# Altium PCB PCB_CONTROL.PcbDoc (part 15 of 15)
Units mil, origin at the board's own origin, x right, y up, seen from the top; angles counter-clockwise.
Board outline 7360.03 x 4773.15 mil, 2 copper layers (Top Layer, Bottom Layer); 73 components, 135 nets, 396 pads, 106 vias.
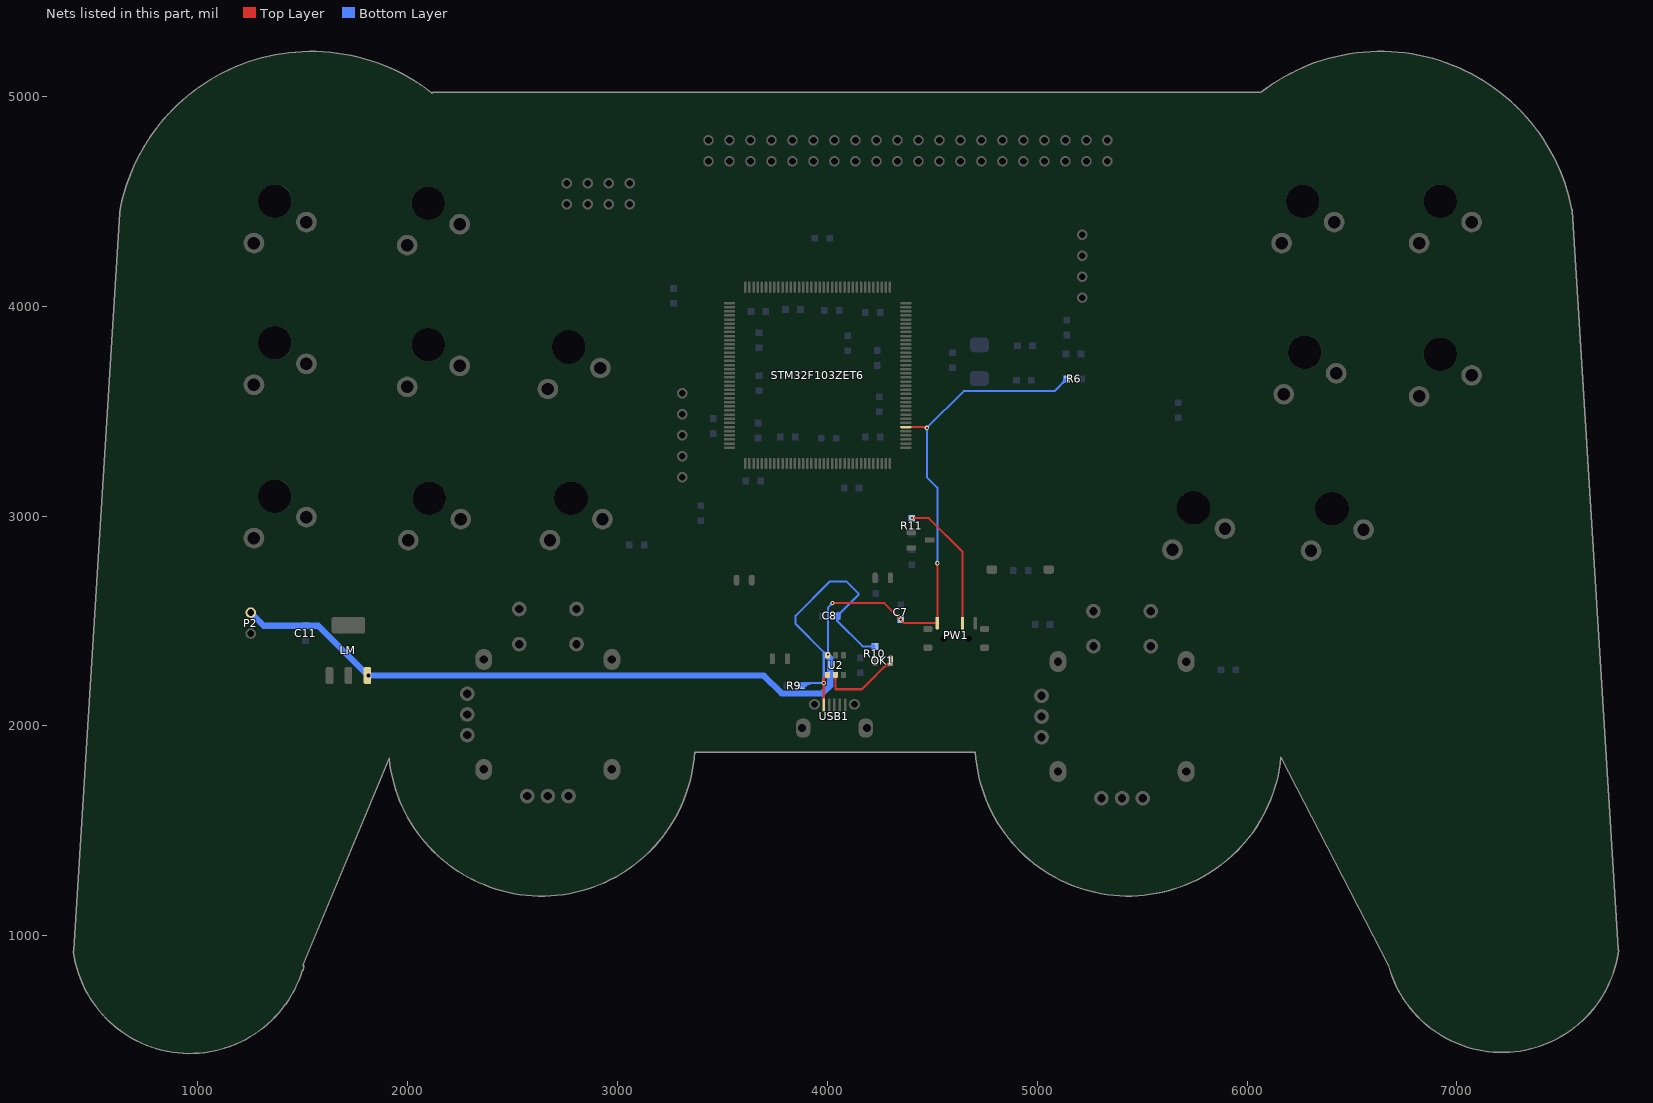
[diagram p15: the nets of this part, all layers, seen from the top]

## Via types
v1: diameter 20, hole 10, Top Layer to Bottom Layer, 104 vias
v2: diameter 30, hole 20, Top Layer to Bottom Layer, 2 vias

## Nets (pads, with @x,y where several pads share a name; then routed paths per layer and width w, separated by ;. In a path a pad name is that pad's centre, name@x,y a point inside that pad or via, vN(x,y) a via of type N, cw(c..) or ccw(c..) an arc to the next point about the centre after c; other vN are vias at no path point) (continued)
STDBY: OK1.2 U2.5 | length 1759.7
  Top Layer w10: U2.5@4040,2243 4040,2175 4166,2175 OK1.2@4301,2310 ; U2.5@4035.05,2235.05 cw(c4023.1,2223.1) 4040,2223.1 ; U2.5@4035.05,2235.05 cw(c4023.1,2223.1) 4040,2223.1 ; U2.5@4035.05,2235.05 cw(c4023.1,2223.1) 4040,2223.1 ; U2.5@4035.05,2235.05 cw(c4023.1,2223.1) 4040,2223.1 ; U2.5@4035.05,2235.05 cw(c4023.1,2223.1) 4040,2223.1 ; U2.5@4035.05,2235.05 cw(c4023.1,2223.1) 4040,2223.1 ; U2.5@4035.05,2235.05 cw(c4023.1,2223.1) 4040,2223.1 ; U2.5@4035.05,2235.05 cw(c4023.1,2223.1) 4040,2223.1 ; U2.5@4035.05,2235.05 cw(c4023.1,2223.1) 4040,2223.1 ; U2.5@4035.05,2235.05 cw(c4023.1,2223.1) 4040,2223.1 ; U2.5@4036.06,2234.22 cw(c4031.7,2227.83) 4039.42,2227.47 ; U2.5@4036.06,2234.22 cw(c4031.7,2227.83) 4039.42,2227.47 ; U2.5@4036.06,2234.22 cw(c4031.7,2227.83) 4039.42,2227.47 ; U2.5@4036.06,2234.22 cw(c4031.7,2227.83) 4039.42,2227.47 ; U2.5@4036.06,2234.22 cw(c4031.7,2227.83) 4039.42,2227.47 ; U2.5@4036.06,2234.22 cw(c4031.7,2227.83) 4039.42,2227.47 ; U2.5@4036.06,2234.22 cw(c4031.7,2227.83) 4039.42,2227.47 ; U2.5@4036.06,2234.22 cw(c4031.7,2227.83) 4039.42,2227.47 ; U2.5@4036.06,2234.22 cw(c4031.7,2227.83) 4039.42,2227.47 ; U2.5@4036.06,2234.22 cw(c4031.7,2227.83) 4039.42,2227.47 ; U2.5@4036.06,2234.22 cw(c4031.7,2227.83) 4039.42,2227.47 ; U2.5@4036.06,2234.22 cw(c4031.7,2227.83) 4039.42,2227.47 ; U2.5@4036.06,2234.22 cw(c4031.7,2227.83) 4039.42,2227.47 ; U2.5@4036.06,2234.22 cw(c4031.7,2227.83) 4039.42,2227.47 ; U2.5@4036.06,2234.22 cw(c4031.7,2227.83) 4039.42,2227.47 ; U2.5@4036.06,2234.22 cw(c4031.7,2227.83) 4039.42,2227.47 ; U2.5@4036.6,2233.88 cw(c4032.85,2227.12) 4040.58,2227.47 ; U2.5@4036.6,2233.88 cw(c4032.85,2227.12) 4040.58,2227.47 ; U2.5@4036.6,2233.88 cw(c4032.85,2227.12) 4040.58,2227.47 ; U2.5@4036.6,2233.88 cw(c4032.85,2227.12) 4040.58,2227.47 ; U2.5@4036.6,2233.88 cw(c4032.85,2227.12) 4040.58,2227.47 ; U2.5@4036.6,2233.88 cw(c4032.85,2227.12) 4040.58,2227.47 ; U2.5@4036.6,2233.88 cw(c4032.85,2227.12) 4040.58,2227.47 ; U2.5@4036.6,2233.88 cw(c4032.85,2227.12) 4040.58,2227.47 ; U2.5@4036.6,2233.88 cw(c4032.85,2227.12) 4040.58,2227.47 ; U2.5@4036.6,2233.88 cw(c4032.85,2227.12) 4040.58,2227.47 ; U2.5@4036.6,2233.88 cw(c4032.85,2227.12) 4040.58,2227.47 ; U2.5@4036.6,2233.88 cw(c4032.85,2227.12) 4040.58,2227.47 ; U2.5@4036.6,2233.88 cw(c4032.85,2227.12) 4040.58,2227.47 ; U2.5@4036.6,2233.88 cw(c4032.85,2227.12) 4040.58,2227.47 ; U2.5@4036.6,2233.88 cw(c4032.85,2227.12) 4040.58,2227.47 ; U2.5@4036.6,2233.88 cw(c4032.85,2227.12) 4040.58,2227.47 ; 4039.42,2227.47 cw(c4047.15,2227.12) U2.5@4043.4,2233.88 ; 4039.42,2227.47 cw(c4047.15,2227.12) U2.5@4043.4,2233.88 ; 4039.42,2227.47 cw(c4047.15,2227.12) U2.5@4043.4,2233.88 ; 4039.42,2227.47 cw(c4047.15,2227.12) U2.5@4043.4,2233.88 ; 4039.42,2227.47 cw(c4047.15,2227.12) U2.5@4043.4,2233.88 ; 4039.42,2227.47 cw(c4047.15,2227.12) U2.5@4043.4,2233.88 ; 4039.42,2227.47 cw(c4047.15,2227.12) U2.5@4043.4,2233.88 ; 4039.42,2227.47 cw(c4047.15,2227.12) U2.5@4043.4,2233.88 ; 4039.42,2227.47 cw(c4047.15,2227.12) U2.5@4043.4,2233.88 ; 4039.42,2227.47 cw(c4047.15,2227.12) U2.5@4043.4,2233.88 ; 4039.42,2227.47 cw(c4047.15,2227.12) U2.5@4043.4,2233.88 ; 4039.42,2227.47 cw(c4047.15,2227.12) U2.5@4043.4,2233.88 ; 4039.42,2227.47 cw(c4047.15,2227.12) U2.5@4043.4,2233.88 ; 4039.42,2227.47 cw(c4047.15,2227.12) U2.5@4043.4,2233.88 ; 4039.42,2227.47 cw(c4047.15,2227.12) U2.5@4043.4,2233.88 ; 4039.42,2227.47 cw(c4047.15,2227.12) U2.5@4043.4,2233.88 ; 4039.42,2227.47 4046.62,2237.74 4039.42,2227.47 ; 4039.42,2227.47 4033.2,2238.36 4039.42,2227.47 ; 4039.42,2227.47 U2.5@4040,2240 ; 4039.42,2227.47 U2.5@4040,2240 ; 4040,2223.1 cw(c4056.9,2223.1) U2.5@4044.95,2235.05 ; 4040,2223.1 cw(c4056.9,2223.1) U2.5@4044.95,2235.05 ; 4040,2223.1 cw(c4056.9,2223.1) U2.5@4044.95,2235.05 ; 4040,2223.1 cw(c4056.9,2223.1) U2.5@4044.95,2235.05 ; 4040,2223.1 cw(c4056.9,2223.1) U2.5@4044.95,2235.05 ; 4040,2223.1 cw(c4056.9,2223.1) U2.5@4044.95,2235.05 ; 4040,2223.1 cw(c4056.9,2223.1) U2.5@4044.95,2235.05 ; 4040,2223.1 cw(c4056.9,2223.1) U2.5@4044.95,2235.05 ; 4040,2223.1 cw(c4056.9,2223.1) U2.5@4044.95,2235.05 ; 4040,2223.1 cw(c4056.9,2223.1) U2.5@4044.95,2235.05 ; U2.5@4040,2240 4040.58,2227.47 ; U2.5@4040,2240 4040.58,2227.47 ; 4040.58,2227.47 cw(c4048.3,2227.83) U2.5@4043.94,2234.22 ; 4040.58,2227.47 cw(c4048.3,2227.83) U2.5@4043.94,2234.22 ; 4040.58,2227.47 cw(c4048.3,2227.83) U2.5@4043.94,2234.22 ; 4040.58,2227.47 cw(c4048.3,2227.83) U2.5@4043.94,2234.22 ; 4040.58,2227.47 cw(c4048.3,2227.83) U2.5@4043.94,2234.22 ; 4040.58,2227.47 cw(c4048.3,2227.83) U2.5@4043.94,2234.22 ; 4040.58,2227.47 cw(c4048.3,2227.83) U2.5@4043.94,2234.22 ; 4040.58,2227.47 cw(c4048.3,2227.83) U2.5@4043.94,2234.22 ; 4040.58,2227.47 cw(c4048.3,2227.83) U2.5@4043.94,2234.22 ; 4040.58,2227.47 cw(c4048.3,2227.83) U2.5@4043.94,2234.22 ; 4040.58,2227.47 cw(c4048.3,2227.83) U2.5@4043.94,2234.22 ; 4040.58,2227.47 cw(c4048.3,2227.83) U2.5@4043.94,2234.22 ; 4040.58,2227.47 cw(c4048.3,2227.83) U2.5@4043.94,2234.22 ; 4040.58,2227.47 cw(c4048.3,2227.83) U2.5@4043.94,2234.22 ; 4040.58,2227.47 cw(c4048.3,2227.83) U2.5@4043.94,2234.22 ; 4040.58,2227.47 cw(c4048.3,2227.83) U2.5@4043.94,2234.22 ; 4040.58,2227.47 4046.8,2238.36 4040.58,2227.47 ; 4040.58,2227.47 4033.38,2237.74 4040.58,2227.47 ; 4266.86,2275.86 cw(c4301,2241.72) OK1.2@4301,2290 ; 4266.86,2275.86 cw(c4301,2241.72) OK1.2@4301,2290 ; 4266.86,2275.86 cw(c4301,2241.72) OK1.2@4301,2290 ; 4266.86,2275.86 cw(c4301,2241.72) OK1.2@4301,2290 ; 4266.86,2275.86 cw(c4301,2241.72) OK1.2@4301,2290 ; 4266.86,2275.86 cw(c4301,2241.72) OK1.2@4301,2290 ; 4266.86,2275.86 cw(c4301,2241.72) OK1.2@4301,2290 ; 4266.86,2275.86 cw(c4301,2241.72) OK1.2@4301,2290 ; 4283.93,2292.93 cw(c4301,2275.86) OK1.2@4301,2300 ; 4283.93,2292.93 cw(c4301,2275.86) OK1.2@4301,2300 ; 4283.93,2292.93 cw(c4301,2275.86) OK1.2@4301,2300 ; 4283.93,2292.93 cw(c4301,2275.86) OK1.2@4301,2300 ; 4283.93,2292.93 cw(c4301,2275.86) OK1.2@4301,2300 ; 4283.93,2292.93 cw(c4301,2275.86) OK1.2@4301,2300 ; 4283.93,2292.93 cw(c4301,2275.86) OK1.2@4301,2300 ; 4283.93,2292.93 cw(c4301,2275.86) OK1.2@4301,2300
VBAT: C7.1 C11.2 LM.3 P2.2 PW1.3 R6.2 STM32F103ZET6.6 U2.3 | length 8905.9
  Top Layer w10: v1(4025,2585) 4273,2585 v1(4351,2507) ; 4319.79,2538.21 v1(4351,2507) ; STM32F103ZET6.6@4375,3423.94 4471.06,3423.94 v1(4475,3420) ; STM32F103ZET6.6@4396,3423.94 4432,3423.94 ; 4487,2490 PW1.3@4525,2490 ; PW1.3@4525,2512 4525,2550 ; 4525,2735 v1(4525,2775) PW1.3@4525,2490 ; v1@4028.54,2581.46 cw(c4037.07,2572.93) 4037.07,2585 ; v1@4028.54,2581.46 cw(c4037.07,2572.93) 4037.07,2585 ; v1@4028.54,2581.46 cw(c4037.07,2572.93) 4037.07,2585 ; v1@4028.54,2581.46 cw(c4037.07,2572.93) 4037.07,2585 ; v1@4028.54,2581.46 cw(c4037.07,2572.93) 4037.07,2585 ; v1@4028.54,2581.46 cw(c4037.07,2572.93) 4037.07,2585 ; v1@4028.54,2581.46 cw(c4037.07,2572.93) 4037.07,2585 ; v1@4028.54,2581.46 cw(c4037.07,2572.93) 4037.07,2585 ; v1@4028.54,2581.46 cw(c4037.07,2572.93) 4037.07,2585 ; v1@4028.54,2588.54 ccw(c4037.07,2597.07) 4037.07,2585 ; v1@4028.54,2588.54 ccw(c4037.07,2597.07) 4037.07,2585 ; v1@4028.54,2588.54 ccw(c4037.07,2597.07) 4037.07,2585 ; v1@4028.54,2588.54 ccw(c4037.07,2597.07) 4037.07,2585 ; v1@4028.54,2588.54 ccw(c4037.07,2597.07) 4037.07,2585 ; v1@4028.54,2588.54 ccw(c4037.07,2597.07) 4037.07,2585 ; v1@4028.54,2588.54 ccw(c4037.07,2597.07) 4037.07,2585 ; v1@4028.54,2588.54 ccw(c4037.07,2597.07) 4037.07,2585 ; v1@4028.54,2588.54 ccw(c4037.07,2597.07) 4037.07,2585 ; 4342.46,2515.54 cw(c4333.93,2507) v1@4346,2507 ; 4342.46,2515.54 ccw(c4351,2524.07) v1@4351,2512 ; 4342.46,2515.54 cw(c4333.93,2507) v1@4346,2507 ; 4342.46,2515.54 ccw(c4351,2524.07) v1@4351,2512 ; 4342.46,2515.54 ccw(c4351,2524.07) v1@4351,2512 ; 4342.46,2515.54 cw(c4333.93,2507) v1@4346,2507 ; 4342.46,2515.54 ccw(c4351,2524.07) v1@4351,2512 ; 4342.46,2515.54 cw(c4333.93,2507) v1@4346,2507 ; 4342.46,2515.54 ccw(c4351,2524.07) v1@4351,2512 ; 4342.46,2515.54 cw(c4333.93,2507) v1@4346,2507 ; 4342.46,2515.54 ccw(c4351,2524.07) v1@4351,2512 ; 4342.46,2515.54 cw(c4333.93,2507) v1@4346,2507 ; 4342.46,2515.54 ccw(c4351,2524.07) v1@4351,2512 ; 4342.46,2515.54 cw(c4333.93,2507) v1@4346,2507 ; 4342.46,2515.54 ccw(c4351,2524.07) v1@4351,2512 ; 4342.46,2515.54 cw(c4333.93,2507) v1@4346,2507 ; 4342.46,2515.54 ccw(c4351,2524.07) v1@4351,2512 ; 4342.46,2515.54 cw(c4333.93,2507) v1@4346,2507 ; 4342.46,2515.54 ccw(c4351,2524.07) v1@4351,2512 ; 4342.46,2515.54 cw(c4333.93,2507) v1@4346,2507 ; 4342.46,2515.54 ccw(c4351,2524.07) v1@4351,2512 ; 4342.46,2515.54 cw(c4333.93,2507) v1@4346,2507 ; 4342.46,2515.54 ccw(c4351,2524.07) v1@4351,2512 ; 4342.46,2515.54 cw(c4333.93,2507) v1@4346,2507 ; 4342.46,2515.54 ccw(c4351,2524.07) v1@4351,2512 ; 4342.46,2515.54 cw(c4333.93,2507) v1@4346,2507 ; 4342.46,2515.54 ccw(c4351,2524.07) v1@4351,2512 ; 4342.46,2515.54 cw(c4333.93,2507) v1@4346,2507 ; 4342.46,2515.54 ccw(c4351,2524.07) v1@4351,2512 ; 4342.46,2515.54 cw(c4333.93,2507) v1@4346,2507 ; 4342.46,2515.54 ccw(c4351,2524.07) v1@4351,2512 ; 4342.46,2515.54 cw(c4333.93,2507) v1@4346,2507 ; 4342.46,2515.54 ccw(c4351,2524.07) v1@4351,2512 ; 4342.46,2515.54 cw(c4333.93,2507) v1@4346,2507 ; v1@4351,2502 cw(c4351,2489.93) 4359.54,2498.46 ; v1@4351,2502 cw(c4351,2489.93) 4359.54,2498.46 ; v1@4351,2502 cw(c4351,2489.93) 4359.54,2498.46 ; v1@4351,2502 cw(c4351,2489.93) 4359.54,2498.46 ; v1@4351,2502 cw(c4351,2489.93) 4359.54,2498.46 ; v1@4351,2502 cw(c4351,2489.93) 4359.54,2498.46 ; v1@4351,2502 cw(c4351,2489.93) 4359.54,2498.46 ; v1@4351,2502 cw(c4351,2489.93) 4359.54,2498.46 ; v1@4351,2502 cw(c4351,2489.93) 4359.54,2498.46 ; v1(4351,2507) 4368,2490 PW1.3@4525,2490 ; v1@4356,2507 ccw(c4368.07,2507) 4359.54,2498.46 ; v1@4356,2507 ccw(c4368.07,2507) 4359.54,2498.46 ; v1@4356,2507 ccw(c4368.07,2507) 4359.54,2498.46 ; v1@4356,2507 ccw(c4368.07,2507) 4359.54,2498.46 ; v1@4356,2507 ccw(c4368.07,2507) 4359.54,2498.46 ; v1@4356,2507 ccw(c4368.07,2507) 4359.54,2498.46 ; v1@4356,2507 ccw(c4368.07,2507) 4359.54,2498.46 ; v1@4356,2507 ccw(c4368.07,2507) 4359.54,2498.46 ; v1@4356,2507 ccw(c4368.07,2507) 4359.54,2498.46 ; 4453.42,3423.94 cw(c4453.42,3398.42) v1@4471.46,3416.46 ; 4453.42,3423.94 cw(c4453.42,3398.42) v1@4471.46,3416.46 ; 4453.42,3423.94 cw(c4453.42,3398.42) v1@4471.46,3416.46 ; 4453.42,3423.94 cw(c4453.42,3398.42) v1@4471.46,3416.46 ; 4453.42,3423.94 cw(c4453.42,3398.42) v1@4471.46,3416.46 ; 4453.42,3423.94 cw(c4453.42,3398.42) v1@4471.46,3416.46 ; 4453.42,3423.94 cw(c4453.42,3398.42) v1@4471.46,3416.46 ; 4453.42,3423.94 cw(c4453.42,3398.42) v1@4471.46,3416.46 ; 4462.44,3421.67 ccw(c4465.89,3427.64) v1@4471.17,3423.21 ; 4462.44,3421.67 ccw(c4465.89,3427.64) v1@4471.17,3423.21 ; 4462.44,3421.67 ccw(c4465.89,3427.64) v1@4471.17,3423.21 ; 4462.44,3421.67 ccw(c4465.89,3427.64) v1@4471.17,3423.21 ; 4462.44,3421.67 ccw(c4465.89,3427.64) v1@4471.17,3423.21 ; 4462.44,3421.67 ccw(c4465.89,3427.64) v1@4471.17,3423.21 ; 4462.44,3421.67 ccw(c4465.89,3427.64) v1@4471.17,3423.21 ; 4462.44,3421.67 ccw(c4465.89,3427.64) v1@4471.17,3423.21 ; 4462.44,3421.67 ccw(c4465.89,3427.64) v1@4471.17,3423.21 ; 4462.44,3421.67 ccw(c4465.89,3427.64) v1@4471.17,3423.21 ; 4462.44,3421.67 ccw(c4465.89,3427.64) v1@4471.17,3423.21 ; 4462.44,3421.67 ccw(c4465.89,3427.64) v1@4471.17,3423.21 ; 4462.44,3421.67 ccw(c4465.89,3427.64) v1@4471.17,3423.21 ; 4462.44,3421.67 ccw(c4465.89,3427.64) v1@4471.17,3423.21 ; 4462.44,3421.67 ccw(c4465.89,3427.64) v1@4471.17,3423.21 ; 4462.44,3421.67 ccw(c4465.89,3427.64) v1@4471.17,3423.21 ; 4462.44,3421.67 ccw(c4465.89,3427.64) v1@4471.17,3423.21 ; 4462.44,3421.67 ccw(c4465.89,3427.64) v1@4471.17,3423.21 ; 4462.44,3421.67 ccw(c4465.89,3427.64) v1@4471.17,3423.21 ; 4462.44,3421.67 ccw(c4465.89,3427.64) v1@4471.17,3423.21 ; 4462.44,3421.67 ccw(c4465.89,3427.64) v1@4471.17,3423.21 ; 4462.44,3421.67 ccw(c4465.89,3427.64) v1@4471.17,3423.21 ; 4462.44,3421.67 ccw(c4465.89,3427.64) v1@4471.17,3423.21 ; 4462.44,3421.67 ccw(c4465.89,3427.64) v1@4471.17,3423.21 ; 4462.44,3421.67 ccw(c4465.89,3427.64) v1@4471.17,3423.21 ; 4462.44,3421.67 ccw(c4465.89,3427.64) v1@4471.17,3423.21 ; 4462.44,3421.67 ccw(c4465.89,3427.64) v1@4471.17,3423.21 ; 4462.44,3421.67 ccw(c4465.89,3427.64) v1@4471.17,3423.21 ; v1@4521.46,2771.46 cw(c4512.93,2762.93) 4525,2762.93 ; v1@4521.46,2771.46 cw(c4512.93,2762.93) 4525,2762.93 ; v1@4521.46,2771.46 cw(c4512.93,2762.93) 4525,2762.93 ; v1@4521.46,2771.46 cw(c4512.93,2762.93) 4525,2762.93 ; v1@4521.46,2771.46 cw(c4512.93,2762.93) 4525,2762.93 ; v1@4521.46,2771.46 cw(c4512.93,2762.93) 4525,2762.93 ; v1@4521.46,2771.46 cw(c4512.93,2762.93) 4525,2762.93 ; v1@4521.46,2771.46 cw(c4512.93,2762.93) 4525,2762.93 ; v1@4521.46,2771.46 cw(c4512.93,2762.93) 4525,2762.93 ; v1@4521.46,2771.46 cw(c4512.93,2762.93) 4525,2762.93 ; v1@4521.46,2771.46 cw(c4512.93,2762.93) 4525,2762.93 ; v1@4521.46,2771.46 cw(c4512.93,2762.93) 4525,2762.93 ; v1@4521.46,2771.46 cw(c4512.93,2762.93) 4525,2762.93 ; v1@4521.46,2771.46 cw(c4512.93,2762.93) 4525,2762.93 ; v1@4521.46,2771.46 cw(c4512.93,2762.93) 4525,2762.93 ; v1@4521.46,2771.46 cw(c4512.93,2762.93) 4525,2762.93 ; v1@4521.46,2771.46 cw(c4512.93,2762.93) 4525,2762.93 ; 4525,2762.93 cw(c4537.07,2762.93) v1@4528.54,2771.46 ; 4525,2762.93 cw(c4537.07,2762.93) v1@4528.54,2771.46 ; 4525,2762.93 cw(c4537.07,2762.93) v1@4528.54,2771.46 ; 4525,2762.93 cw(c4537.07,2762.93) v1@4528.54,2771.46 ; 4525,2762.93 cw(c4537.07,2762.93) v1@4528.54,2771.46 ; 4525,2762.93 cw(c4537.07,2762.93) v1@4528.54,2771.46 ; 4525,2762.93 cw(c4537.07,2762.93) v1@4528.54,2771.46 ; 4525,2762.93 cw(c4537.07,2762.93) v1@4528.54,2771.46 ; 4525,2762.93 cw(c4537.07,2762.93) v1@4528.54,2771.46 ; 4525,2762.93 cw(c4537.07,2762.93) v1@4528.54,2771.46 ; 4525,2762.93 cw(c4537.07,2762.93) v1@4528.54,2771.46 ; 4525,2762.93 cw(c4537.07,2762.93) v1@4528.54,2771.46 ; 4525,2762.93 cw(c4537.07,2762.93) v1@4528.54,2771.46 ; 4525,2762.93 cw(c4537.07,2762.93) v1@4528.54,2771.46 ; 4525,2762.93 cw(c4537.07,2762.93) v1@4528.54,2771.46 ; 4525,2762.93 cw(c4537.07,2762.93) v1@4528.54,2771.46 ; 4525,2762.93 cw(c4537.07,2762.93) v1@4528.54,2771.46
  Bottom Layer w10: v1@4001.45,2336.48 cw(c3992.87,2327.98) 4004.95,2327.93 cw(c4017.02,2327.87) v1@4008.52,2336.45 ; v1(4005,2340) 4005,2565 ; 4475,3380 v1(4475,3420) ; v1(4525,2775) 4525,3135 4475,3185 v1(4475,3420) ; R6.2@5141,3653 5083,3595 4650,3595 v1(4475,3420) ; v1@4001.46,2343.54 ccw(c3992.93,2352.07) 4005,2352.07 ; v1@4001.46,2343.54 ccw(c3992.93,2352.07) 4005,2352.07 ; v1@4001.46,2343.54 ccw(c3992.93,2352.07) 4005,2352.07 ; v1@4001.46,2343.54 ccw(c3992.93,2352.07) 4005,2352.07 ; v1@4001.46,2343.54 ccw(c3992.93,2352.07) 4005,2352.07 ; v1@4001.46,2343.54 ccw(c3992.93,2352.07) 4005,2352.07 ; v1@4001.46,2343.54 ccw(c3992.93,2352.07) 4005,2352.07 ; v1@4001.46,2343.54 ccw(c3992.93,2352.07) 4005,2352.07 ; v1@4001.46,2343.54 ccw(c3992.93,2352.07) 4005,2352.07 ; 4005,2352.07 ccw(c4017.07,2352.07) v1@4008.54,2343.54 ; 4005,2352.07 ccw(c4017.07,2352.07) v1@4008.54,2343.54 ; 4005,2352.07 ccw(c4017.07,2352.07) v1@4008.54,2343.54 ; 4005,2352.07 ccw(c4017.07,2352.07) v1@4008.54,2343.54 ; 4005,2352.07 ccw(c4017.07,2352.07) v1@4008.54,2343.54 ; 4005,2352.07 ccw(c4017.07,2352.07) v1@4008.54,2343.54 ; 4005,2352.07 ccw(c4017.07,2352.07) v1@4008.54,2343.54 ; 4005,2352.07 ccw(c4017.07,2352.07) v1@4008.54,2343.54 ; 4005,2352.07 ccw(c4017.07,2352.07) v1@4008.54,2343.54 ; 4005,2565 v1(4025,2585) 4005,2565 ; 4016.46,2576.46 cw(c4025,2567.93) v1@4025,2580 ; 4016.46,2576.46 ccw(c4007.93,2585) v1@4020,2585 ; 4016.46,2576.46 cw(c4025,2567.93) v1@4025,2580 ; 4016.46,2576.46 ccw(c4007.93,2585) v1@4020,2585 ; 4016.46,2576.46 ccw(c4007.93,2585) v1@4020,2585 ; 4016.46,2576.46 cw(c4025,2567.93) v1@4025,2580 ; 4016.46,2576.46 ccw(c4007.93,2585) v1@4020,2585 ; 4016.46,2576.46 cw(c4025,2567.93) v1@4025,2580 ; 4016.46,2576.46 ccw(c4007.93,2585) v1@4020,2585 ; 4016.46,2576.46 cw(c4025,2567.93) v1@4025,2580 ; 4016.46,2576.46 ccw(c4007.93,2585) v1@4020,2585 ; 4016.46,2576.46 cw(c4025,2567.93) v1@4025,2580 ; 4016.46,2576.46 ccw(c4007.93,2585) v1@4020,2585 ; 4016.46,2576.46 cw(c4025,2567.93) v1@4025,2580 ; 4016.46,2576.46 ccw(c4007.93,2585) v1@4020,2585 ; 4016.46,2576.46 cw(c4025,2567.93) v1@4025,2580 ; 4016.46,2576.46 ccw(c4007.93,2585) v1@4020,2585 ; 4016.46,2576.46 cw(c4025,2567.93) v1@4025,2580 ; 4016.46,2576.46 ccw(c4007.93,2585) v1@4020,2585 ; 4016.46,2576.46 cw(c4025,2567.93) v1@4025,2580 ; 4016.46,2576.46 ccw(c4007.93,2585) v1@4020,2585 ; 4016.46,2576.46 cw(c4025,2567.93) v1@4025,2580 ; 4016.46,2576.46 ccw(c4007.93,2585) v1@4020,2585 ; 4016.46,2576.46 cw(c4025,2567.93) v1@4025,2580 ; 4016.46,2576.46 ccw(c4007.93,2585) v1@4020,2585 ; 4016.46,2576.46 cw(c4025,2567.93) v1@4025,2580 ; 4016.46,2576.46 ccw(c4007.93,2585) v1@4020,2585 ; 4016.46,2576.46 cw(c4025,2567.93) v1@4025,2580 ; 4016.46,2576.46 ccw(c4007.93,2585) v1@4020,2585 ; 4016.46,2576.46 cw(c4025,2567.93) v1@4025,2580 ; 4016.46,2576.46 ccw(c4007.93,2585) v1@4020,2585 ; 4016.46,2576.46 cw(c4025,2567.93) v1@4025,2580 ; 4016.46,2576.46 ccw(c4007.93,2585) v1@4020,2585 ; 4016.46,2576.46 cw(c4025,2567.93) v1@4025,2580 ; v1@4471.46,3416.46 cw(c4462.93,3407.93) 4475,3407.93 ; v1@4471.46,3416.46 cw(c4462.93,3407.93) 4475,3407.93 ; v1@4471.46,3416.46 cw(c4462.93,3407.93) 4475,3407.93 ; v1@4471.46,3416.46 cw(c4462.93,3407.93) 4475,3407.93 ; v1@4471.46,3416.46 cw(c4462.93,3407.93) 4475,3407.93 ; v1@4471.46,3416.46 cw(c4462.93,3407.93) 4475,3407.93 ; v1@4471.46,3416.46 cw(c4462.93,3407.93) 4475,3407.93 ; v1@4471.46,3416.46 cw(c4462.93,3407.93) 4475,3407.93 ; v1@4471.46,3416.46 cw(c4462.93,3407.93) 4475,3407.93 ; v1@4471.46,3416.46 cw(c4462.93,3407.93) 4475,3407.93 ; v1@4471.46,3416.46 cw(c4462.93,3407.93) 4475,3407.93 ; v1@4471.46,3416.46 cw(c4462.93,3407.93) 4475,3407.93 ; v1@4471.46,3416.46 cw(c4462.93,3407.93) 4475,3407.93 ; v1@4471.46,3416.46 cw(c4462.93,3407.93) 4475,3407.93 ; v1@4471.46,3416.46 cw(c4462.93,3407.93) 4475,3407.93 ; v1@4471.46,3416.46 cw(c4462.93,3407.93) 4475,3407.93 ; v1@4471.46,3416.46 cw(c4462.93,3407.93) 4475,3407.93 ; 4475,3407.93 cw(c4487.07,3407.93) v1@4478.54,3416.46 ; 4475,3407.93 cw(c4487.07,3407.93) v1@4478.54,3416.46 ; 4475,3407.93 cw(c4487.07,3407.93) v1@4478.54,3416.46 ; 4475,3407.93 cw(c4487.07,3407.93) v1@4478.54,3416.46 ; 4475,3407.93 cw(c4487.07,3407.93) v1@4478.54,3416.46 ; 4475,3407.93 cw(c4487.07,3407.93) v1@4478.54,3416.46 ; 4475,3407.93 cw(c4487.07,3407.93) v1@4478.54,3416.46 ; 4475,3407.93 cw(c4487.07,3407.93) v1@4478.54,3416.46 ; 4475,3407.93 cw(c4487.07,3407.93) v1@4478.54,3416.46 ; 4475,3407.93 cw(c4487.07,3407.93) v1@4478.54,3416.46 ; 4475,3407.93 cw(c4487.07,3407.93) v1@4478.54,3416.46 ; 4475,3407.93 cw(c4487.07,3407.93) v1@4478.54,3416.46 ; 4475,3407.93 cw(c4487.07,3407.93) v1@4478.54,3416.46 ; 4475,3407.93 cw(c4487.07,3407.93) v1@4478.54,3416.46 ; 4475,3407.93 cw(c4487.07,3407.93) v1@4478.54,3416.46 ; 4475,3407.93 cw(c4487.07,3407.93) v1@4478.54,3416.46 ; 4475,3407.93 cw(c4487.07,3407.93) v1@4478.54,3416.46 ; v1@4475,3425 ccw(c4475,3437.07) 4483.54,3428.54 ; v1@4475,3425 ccw(c4475,3437.07) 4483.54,3428.54 ; v1@4475,3425 ccw(c4475,3437.07) 4483.54,3428.54 ; v1@4475,3425 ccw(c4475,3437.07) 4483.54,3428.54 ; v1@4475,3425 ccw(c4475,3437.07) 4483.54,3428.54 ; v1@4475,3425 ccw(c4475,3437.07) 4483.54,3428.54 ; v1@4475,3425 ccw(c4475,3437.07) 4483.54,3428.54 ; v1@4475,3425 ccw(c4475,3437.07) 4483.54,3428.54 ; v1@4475,3425 ccw(c4475,3437.07) 4483.54,3428.54 ; v1@4480,3420 cw(c4492.07,3420) 4483.54,3428.54 ; v1@4480,3420 cw(c4492.07,3420) 4483.54,3428.54 ; v1@4480,3420 cw(c4492.07,3420) 4483.54,3428.54 ; v1@4480,3420 cw(c4492.07,3420) 4483.54,3428.54 ; v1@4480,3420 cw(c4492.07,3420) 4483.54,3428.54 ; v1@4480,3420 cw(c4492.07,3420) 4483.54,3428.54 ; v1@4480,3420 cw(c4492.07,3420) 4483.54,3428.54 ; v1@4480,3420 cw(c4492.07,3420) 4483.54,3428.54 ; v1@4480,3420 cw(c4492.07,3420) 4483.54,3428.54 ; v1@4521.46,2778.54 ccw(c4512.93,2787.07) 4525,2787.07 ; v1@4521.46,2778.54 ccw(c4512.93,2787.07) 4525,2787.07 ; v1@4521.46,2778.54 ccw(c4512.93,2787.07) 4525,2787.07 ; v1@4521.46,2778.54 ccw(c4512.93,2787.07) 4525,2787.07 ; v1@4521.46,2778.54 ccw(c4512.93,2787.07) 4525,2787.07 ; v1@4521.46,2778.54 ccw(c4512.93,2787.07) 4525,2787.07 ; v1@4521.46,2778.54 ccw(c4512.93,2787.07) 4525,2787.07 ; v1@4521.46,2778.54 ccw(c4512.93,2787.07) 4525,2787.07 ; v1@4521.46,2778.54 ccw(c4512.93,2787.07) 4525,2787.07 ; 4525,2787.07 ccw(c4537.07,2787.07) v1@4528.54,2778.54 ; 4525,2787.07 ccw(c4537.07,2787.07) v1@4528.54,2778.54 ; 4525,2787.07 ccw(c4537.07,2787.07) v1@4528.54,2778.54 ; 4525,2787.07 ccw(c4537.07,2787.07) v1@4528.54,2778.54 ; 4525,2787.07 ccw(c4537.07,2787.07) v1@4528.54,2778.54 ; 4525,2787.07 ccw(c4537.07,2787.07) v1@4528.54,2778.54 ; 4525,2787.07 ccw(c4537.07,2787.07) v1@4528.54,2778.54 ; 4525,2787.07 ccw(c4537.07,2787.07) v1@4528.54,2778.54 ; 4525,2787.07 ccw(c4537.07,2787.07) v1@4528.54,2778.54 ; 5122.22,3634.22 cw(c5141,3615.44) R6.2@5141,3642 ; 5122.22,3634.22 ccw(c5103.44,3653) R6.2@5130,3653 ; 5122.22,3634.22 ccw(c5103.44,3653) R6.2@5130,3653 ; 5122.22,3634.22 cw(c5141,3615.44) R6.2@5141,3642 ; 5122.22,3634.22 ccw(c5103.44,3653) R6.2@5130,3653 ; 5122.22,3634.22 cw(c5141,3615.44) R6.2@5141,3642 ; 5122.22,3634.22 ccw(c5103.44,3653) R6.2@5130,3653 ; 5122.22,3634.22 cw(c5141,3615.44) R6.2@5141,3642 ; 5122.22,3634.22 ccw(c5103.44,3653) R6.2@5130,3653 ; 5122.22,3634.22 cw(c5141,3615.44) R6.2@5141,3642 ; 5122.22,3634.22 ccw(c5103.44,3653) R6.2@5130,3653 ; 5122.22,3634.22 cw(c5141,3615.44) R6.2@5141,3642 ; 5122.22,3634.22 ccw(c5103.44,3653) R6.2@5130,3653 ; 5122.22,3634.22 cw(c5141,3615.44) R6.2@5141,3642 ; 5122.22,3634.22 ccw(c5103.44,3653) R6.2@5130,3653 ; 5122.22,3634.22 cw(c5141,3615.44) R6.2@5141,3642 ; v1@4001.46,2336.46 cw(c3993.37,2328.37) 4004.82,2328.37 ccw(c3993.37,2328.37) v1@4001.46,2336.46 ; 4004.82,2327.49 cw(c4017.51,2327.49) 4008.54,2336.46 ccw(c4017.51,2327.49) 4004.82,2327.49
  Bottom Layer w30: P2.2@1255,2540 1317,2478 C11.2@1516,2478 1577,2478 v2(1815,2240) 3698.3,2240 3783.3,2155 3977.66,2155 4014.82,2192.16 4014.82,2321.34 4009.82,2326.34
VIN: PW1.2 R11.2 | length 949.9
  Top Layer w10: v1(4405,2990) 4485,2990 4645,2830 PW1.2@4645,2490 ; v1@4408.54,2986.46 cw(c4417.07,2977.93) 4417.07,2990 ; v1@4408.54,2986.46 cw(c4417.07,2977.93) 4417.07,2990 ; v1@4408.54,2986.46 cw(c4417.07,2977.93) 4417.07,2990 ; v1@4408.54,2986.46 cw(c4417.07,2977.93) 4417.07,2990 ; v1@4408.54,2986.46 cw(c4417.07,2977.93) 4417.07,2990 ; v1@4408.54,2986.46 cw(c4417.07,2977.93) 4417.07,2990 ; v1@4408.54,2986.46 cw(c4417.07,2977.93) 4417.07,2990 ; v1@4408.54,2986.46 cw(c4417.07,2977.93) 4417.07,2990 ; v1@4408.54,2986.46 cw(c4417.07,2977.93) 4417.07,2990 ; v1@4408.54,2986.46 cw(c4417.07,2977.93) 4417.07,2990 ; v1@4408.54,2993.54 ccw(c4417.07,3002.07) 4417.07,2990 ; v1@4408.54,2993.54 ccw(c4417.07,3002.07) 4417.07,2990 ; v1@4408.54,2993.54 ccw(c4417.07,3002.07) 4417.07,2990 ; v1@4408.54,2993.54 ccw(c4417.07,3002.07) 4417.07,2990 ; v1@4408.54,2993.54 ccw(c4417.07,3002.07) 4417.07,2990 ; v1@4408.54,2993.54 ccw(c4417.07,3002.07) 4417.07,2990 ; v1@4408.54,2993.54 ccw(c4417.07,3002.07) 4417.07,2990 ; v1@4408.54,2993.54 ccw(c4417.07,3002.07) 4417.07,2990 ; v1@4408.54,2993.54 ccw(c4417.07,3002.07) 4417.07,2990 ; v1@4408.54,2993.54 ccw(c4417.07,3002.07) 4417.07,2990 ; PW1.2@4645,2512 4645,2550 ; PW1.2@4645,2512 4645,2550 ; PW1.2@4645,2512 4645,2550
VUSB: C8.2 R9.2 R10.2 U2.4 USB1.1 | length 6675.6
  Top Layer w10: USB1.1@3983.82,2100 v1(3983.82,2205) 3983.82,2224.82 U2.4@4002,2243 ; v1@3980.28,2201.46 cw(c3971.75,2192.93) 3983.82,2192.93 ; v1@3980.28,2201.46 cw(c3971.75,2192.93) 3983.82,2192.93 ; v1@3980.28,2201.46 cw(c3971.75,2192.93) 3983.82,2192.93 ; v1@3980.28,2201.46 cw(c3971.75,2192.93) 3983.82,2192.93 ; v1@3980.28,2208.54 ccw(c3971.75,2217.07) 3983.82,2217.07 ; v1@3980.28,2208.54 ccw(c3971.75,2217.07) 3983.82,2217.07 ; v1@3980.28,2208.54 ccw(c3971.75,2217.07) 3983.82,2217.07 ; v1@3980.28,2208.54 ccw(c3971.75,2217.07) 3983.82,2217.07 ; USB1.1@3983.82,2126 3983.82,2162 ; USB1.1@3983.82,2126 3983.82,2162 ; USB1.1@3983.82,2126 3983.82,2162 ; 3983.82,2192.93 cw(c3995.89,2192.93) v1@3987.35,2201.46 ; 3983.82,2192.93 cw(c3995.89,2192.93) v1@3987.35,2201.46 ; 3983.82,2192.93 cw(c3995.89,2192.93) v1@3987.35,2201.46 ; 3983.82,2192.93 cw(c3995.89,2192.93) v1@3987.35,2201.46 ; 3983.82,2217.07 ccw(c3995.89,2217.07) v1@3987.35,2208.54 ; 3983.82,2217.07 ccw(c3995.89,2217.07) v1@3987.35,2208.54 ; 3983.82,2217.07 ccw(c3995.89,2217.07) v1@3987.35,2208.54 ; 3983.82,2217.07 ccw(c3995.89,2217.07) v1@3987.35,2208.54 ; 3984.93,2225.93 cw(c4002,2208.86) U2.4@4002,2233 ; 3984.93,2225.93 cw(c4002,2208.86) U2.4@4002,2233 ; 3984.93,2225.93 cw(c4002,2208.86) U2.4@4002,2233 ; 3984.93,2225.93 cw(c4002,2208.86) U2.4@4002,2233 ; 3984.93,2225.93 cw(c4002,2208.86) U2.4@4002,2233 ; 3984.93,2225.93 cw(c4002,2208.86) U2.4@4002,2233 ; 3984.93,2225.93 cw(c4002,2208.86) U2.4@4002,2233 ; 3984.93,2225.93 cw(c4002,2208.86) U2.4@4002,2233
  Bottom Layer w10: R9.2@3879,2192 3892,2205 v1(3983.82,2205) 3983.82,2351.88 3850,2485.7 3850,2525 4014,2689 4091,2689 4150,2630 4150,2626 C8.2@4048,2524 ; C8.2@4037.36,2521.19 4046.84,2506.82 ; C8.2@4037.84,2519.79 4049.16,2506.82 ; C8.2@4058.16,2519.79 4046.84,2506.82 ; C8.2@4058.64,2521.19 4049.16,2506.82 ; R10.2@4228,2379 4169,2379 4048,2500 ; R9.2@3872.64,2198.36 cw(c3888.66,2182.34) R9.2@3888.66,2205 ; R9.2@3872.64,2198.36 cw(c3888.66,2182.34) R9.2@3888.66,2205 ; R9.2@3872.64,2198.36 cw(c3888.66,2182.34) R9.2@3888.66,2205 ; R9.2@3872.64,2198.36 cw(c3888.66,2182.34) R9.2@3888.66,2205 ; R9.2@3872.64,2198.36 cw(c3888.66,2182.34) R9.2@3888.66,2205 ; R9.2@3872.64,2198.36 cw(c3888.66,2182.34) R9.2@3888.66,2205 ; R9.2@3872.64,2198.36 cw(c3888.66,2182.34) R9.2@3888.66,2205 ; R9.2@3872.64,2198.36 cw(c3888.66,2182.34) R9.2@3888.66,2205 ; R9.2@3879.58,2192.81 ccw(c3890.52,2207.98) 3899.88,2191.78 ; R9.2@3879.58,2192.81 ccw(c3890.52,2207.98) 3899.88,2191.78 ; R9.2@3879.58,2192.81 ccw(c3890.52,2207.98) 3899.88,2191.78 ; R9.2@3879.58,2192.81 ccw(c3890.52,2207.98) 3899.88,2191.78 ; R9.2@3879.58,2192.81 ccw(c3890.52,2207.98) 3899.88,2191.78 ; R9.2@3879.58,2192.81 ccw(c3890.52,2207.98) 3899.88,2191.78 ; R9.2@3879.58,2192.81 ccw(c3890.52,2207.98) 3899.88,2191.78 ; R9.2@3879.58,2192.81 ccw(c3890.52,2207.98) 3899.88,2191.78 ; R9.2@3879.58,2192.81 ccw(c3890.52,2207.98) 3899.88,2191.78 ; R9.2@3879.58,2192.81 ccw(c3890.52,2207.98) 3899.88,2191.78 ; R9.2@3879.58,2192.81 ccw(c3890.52,2207.98) 3899.88,2191.78 ; R9.2@3879.58,2192.81 ccw(c3890.52,2207.98) 3899.88,2191.78 ; R9.2@3879.58,2192.81 ccw(c3890.52,2207.98) 3899.88,2191.78 ; R9.2@3879.58,2192.81 ccw(c3890.52,2207.98) 3899.88,2191.78 ; R9.2@3879.58,2192.81 ccw(c3890.52,2207.98) 3899.88,2191.78 ; R9.2@3879.58,2192.81 ccw(c3890.52,2207.98) 3899.88,2191.78 ; R9.2@3879.58,2192.81 ccw(c3890.52,2207.98) 3899.88,2191.78 ; R9.2@3879.58,2192.81 ccw(c3890.52,2207.98) 3899.88,2191.78 ; R9.2@3879.58,2192.81 ccw(c3890.52,2207.98) 3899.88,2191.78 ; R9.2@3879.58,2192.81 ccw(c3890.52,2207.98) 3899.88,2191.78 ; R9.2@3879.58,2192.81 ccw(c3890.52,2207.98) 3899.88,2191.78 ; R9.2@3879.58,2192.81 ccw(c3890.52,2207.98) 3899.88,2191.78 ; R9.2@3879.58,2192.81 ccw(c3890.52,2207.98) 3899.88,2191.78 ; R9.2@3879.58,2192.81 ccw(c3890.52,2207.98) 3899.88,2191.78 ; R9.2@3879.58,2192.81 ccw(c3890.52,2207.98) 3899.88,2191.78 ; R9.2@3879.58,2192.81 ccw(c3890.52,2207.98) 3899.88,2191.78 ; R9.2@3879.58,2192.81 ccw(c3890.52,2207.98) 3899.88,2191.78 ; R9.2@3879.58,2192.81 ccw(c3890.52,2207.98) 3899.88,2191.78 ; R9.2@3879.71,2191.29 cw(c3912.8,2158.2) 3912.8,2205 ; R9.2@3879.71,2191.29 cw(c3912.8,2158.2) 3912.8,2205 ; R9.2@3879.71,2191.29 cw(c3912.8,2158.2) 3912.8,2205 ; R9.2@3879.71,2191.29 cw(c3912.8,2158.2) 3912.8,2205 ; R9.2@3879.71,2191.29 cw(c3912.8,2158.2) 3912.8,2205 ; R9.2@3879.71,2191.29 cw(c3912.8,2158.2) 3912.8,2205 ; R9.2@3879.71,2191.29 cw(c3912.8,2158.2) 3912.8,2205 ; R9.2@3879.71,2191.29 cw(c3912.8,2158.2) 3912.8,2205 ; R9.2@3883.32,2202.11 ccw(c3890.75,2219.5) 3900.2,2203.13 ; R9.2@3883.32,2202.11 ccw(c3890.75,2219.5) 3900.2,2203.13 ; R9.2@3883.32,2202.11 ccw(c3890.75,2219.5) 3900.2,2203.13 ; R9.2@3883.32,2202.11 ccw(c3890.75,2219.5) 3900.2,2203.13 ; R9.2@3883.32,2202.11 ccw(c3890.75,2219.5) 3900.2,2203.13 ; R9.2@3883.32,2202.11 ccw(c3890.75,2219.5) 3900.2,2203.13 ; R9.2@3883.32,2202.11 ccw(c3890.75,2219.5) 3900.2,2203.13 ; R9.2@3883.32,2202.11 ccw(c3890.75,2219.5) 3900.2,2203.13 ; R9.2@3883.32,2202.11 ccw(c3890.75,2219.5) 3900.2,2203.13 ; R9.2@3883.32,2202.11 ccw(c3890.75,2219.5) 3900.2,2203.13 ; R9.2@3883.32,2202.11 ccw(c3890.75,2219.5) 3900.2,2203.13 ; R9.2@3883.32,2202.11 ccw(c3890.75,2219.5) 3900.2,2203.13 ; R9.2@3883.32,2202.11 ccw(c3890.75,2219.5) 3900.2,2203.13 ; R9.2@3883.32,2202.11 ccw(c3890.75,2219.5) 3900.2,2203.13 ; R9.2@3883.32,2202.11 ccw(c3890.75,2219.5) 3900.2,2203.13 ; R9.2@3883.32,2202.11 ccw(c3890.75,2219.5) 3900.2,2203.13 ; R9.2@3883.32,2202.11 ccw(c3890.75,2219.5) 3900.2,2203.13 ; R9.2@3883.32,2202.11 ccw(c3890.75,2219.5) 3900.2,2203.13 ; R9.2@3883.32,2202.11 ccw(c3890.75,2219.5) 3900.2,2203.13 ; R9.2@3883.32,2202.11 ccw(c3890.75,2219.5) 3900.2,2203.13 ; R9.2@3883.32,2202.11 ccw(c3890.75,2219.5) 3900.2,2203.13 ; R9.2@3883.32,2202.11 ccw(c3890.75,2219.5) 3900.2,2203.13 ; R9.2@3883.32,2202.11 ccw(c3890.75,2219.5) 3900.2,2203.13 ; R9.2@3883.32,2202.11 ccw(c3890.75,2219.5) 3900.2,2203.13 ; R9.2@3883.32,2202.11 ccw(c3890.75,2219.5) 3900.2,2203.13 ; R9.2@3883.32,2202.11 ccw(c3890.75,2219.5) 3900.2,2203.13 ; R9.2@3883.32,2202.11 ccw(c3890.75,2219.5) 3900.2,2203.13 ; R9.2@3883.32,2202.11 ccw(c3890.75,2219.5) 3900.2,2203.13 ; R9.2@3885.43,2200.92 ccw(c3900.44,2221.73) 3913.27,2199.51 ; R9.2@3885.43,2200.92 ccw(c3900.44,2221.73) 3913.27,2199.51 ; R9.2@3885.43,2200.92 ccw(c3900.44,2221.73) 3913.27,2199.51 ; R9.2@3885.43,2200.92 ccw(c3900.44,2221.73) 3913.27,2199.51 ; R9.2@3885.43,2200.92 ccw(c3900.44,2221.73) 3913.27,2199.51 ; R9.2@3885.43,2200.92 ccw(c3900.44,2221.73) 3913.27,2199.51 ; R9.2@3885.43,2200.92 ccw(c3900.44,2221.73) 3913.27,2199.51 ; R9.2@3885.43,2200.92 ccw(c3900.44,2221.73) 3913.27,2199.51 ; R9.2@3885.43,2200.92 ccw(c3900.44,2221.73) 3913.27,2199.51 ; R9.2@3885.43,2200.92 ccw(c3900.44,2221.73) 3913.27,2199.51 ; R9.2@3885.43,2200.92 ccw(c3900.44,2221.73) 3913.27,2199.51 ; R9.2@3885.43,2200.92 ccw(c3900.44,2221.73) 3913.27,2199.51 ; R9.2@3885.43,2200.92 ccw(c3900.44,2221.73) 3913.27,2199.51 ; R9.2@3885.43,2200.92 ccw(c3900.44,2221.73) 3913.27,2199.51 ; R9.2@3885.43,2200.92 ccw(c3900.44,2221.73) 3913.27,2199.51 ; R9.2@3885.43,2200.92 ccw(c3900.44,2221.73) 3913.27,2199.51 ; R9.2@3885.43,2200.92 ccw(c3900.44,2221.73) 3913.27,2199.51 ; R9.2@3885.43,2200.92 ccw(c3900.44,2221.73) 3913.27,2199.51 ; R9.2@3885.43,2200.92 ccw(c3900.44,2221.73) 3913.27,2199.51 ; R9.2@3885.43,2200.92 ccw(c3900.44,2221.73) 3913.27,2199.51 ; R9.2@3885.43,2200.92 ccw(c3900.44,2221.73) 3913.27,2199.51 ; R9.2@3885.43,2200.92 ccw(c3900.44,2221.73) 3913.27,2199.51 ; R9.2@3885.43,2200.92 ccw(c3900.44,2221.73) 3913.27,2199.51 ; R9.2@3885.43,2200.92 ccw(c3900.44,2221.73) 3913.27,2199.51 ; R9.2@3885.43,2200.92 ccw(c3900.44,2221.73) 3913.27,2199.51 ; R9.2@3885.43,2200.92 ccw(c3900.44,2221.73) 3913.27,2199.51 ; R9.2@3885.43,2200.92 ccw(c3900.44,2221.73) 3913.27,2199.51 ; R9.2@3885.43,2200.92 ccw(c3900.44,2221.73) 3913.27,2199.51 ; R9.2@3886.78,2184.22 cw(c3936.94,2134.06) 3936.94,2205 ; R9.2@3886.78,2184.22 cw(c3936.94,2134.06) 3936.94,2205 ; R9.2@3886.78,2184.22 cw(c3936.94,2134.06) 3936.94,2205 ; R9.2@3886.78,2184.22 cw(c3936.94,2134.06) 3936.94,2205 ; R9.2@3886.78,2184.22 cw(c3936.94,2134.06) 3936.94,2205 ; R9.2@3886.78,2184.22 cw(c3936.94,2134.06) 3936.94,2205 ; R9.2@3886.78,2184.22 cw(c3936.94,2134.06) 3936.94,2205 ; R9.2@3886.78,2184.22 cw(c3936.94,2134.06) 3936.94,2205 ; R9.2@3889.65,2189.25 cw(c3911.47,2183.61) 3900.2,2203.13 ; R9.2@3889.65,2189.25 cw(c3911.47,2183.61) 3900.2,2203.13 ; R9.2@3889.65,2189.25 cw(c3911.47,2183.61) 3900.2,2203.13 ; R9.2@3889.65,2189.25 cw(c3911.47,2183.61) 3900.2,2203.13 ; R9.2@3889.65,2189.25 cw(c3911.47,2183.61) 3900.2,2203.13 ; R9.2@3889.65,2189.25 cw(c3911.47,2183.61) 3900.2,2203.13 ; R9.2@3889.65,2189.25 cw(c3911.47,2183.61) 3900.2,2203.13 ; R9.2@3889.65,2189.25 cw(c3911.47,2183.61) 3900.2,2203.13 ; R9.2@3889.65,2189.25 cw(c3911.47,2183.61) 3900.2,2203.13 ; R9.2@3889.65,2189.25 cw(c3911.47,2183.61) 3900.2,2203.13 ; R9.2@3889.65,2189.25 cw(c3911.47,2183.61) 3900.2,2203.13 ; R9.2@3889.65,2189.25 cw(c3911.47,2183.61) 3900.2,2203.13 ; R9.2@3889.65,2189.25 cw(c3911.47,2183.61) 3900.2,2203.13 ; R9.2@3889.65,2189.25 cw(c3911.47,2183.61) 3900.2,2203.13 ; R9.2@3889.65,2189.25 cw(c3911.47,2183.61) 3900.2,2203.13 ; R9.2@3889.65,2189.25 cw(c3911.47,2183.61) 3900.2,2203.13 ; R9.2@3889.65,2189.25 cw(c3911.47,2183.61) 3900.2,2203.13 ; R9.2@3889.65,2189.25 cw(c3911.47,2183.61) 3900.2,2203.13 ; R9.2@3889.65,2189.25 cw(c3911.47,2183.61) 3900.2,2203.13 ; R9.2@3889.65,2189.25 cw(c3911.47,2183.61) 3900.2,2203.13 ; R9.2@3889.65,2189.25 cw(c3911.47,2183.61) 3900.2,2203.13 ; R9.2@3889.65,2189.25 cw(c3911.47,2183.61) 3900.2,2203.13 ; R9.2@3889.65,2189.25 cw(c3911.47,2183.61) 3900.2,2203.13 ; R9.2@3889.65,2189.25 cw(c3911.47,2183.61) 3900.2,2203.13 ; R9.2@3889.65,2189.25 cw(c3911.47,2183.61) 3900.2,2203.13 ; R9.2@3889.65,2189.25 cw(c3911.47,2183.61) 3900.2,2203.13 ; R9.2@3889.65,2189.25 cw(c3911.47,2183.61) 3900.2,2203.13 ; R9.2@3889.65,2189.25 cw(c3911.47,2183.61) 3900.2,2203.13 ; 3971.75,2205 cw(c3971.75,2192.93) v1@3980.28,2201.46 ; 3971.75,2205 ccw(c3971.75,2217.07) v1@3980.28,2208.54 ; 3971.75,2205 ccw(c3971.75,2217.07) v1@3980.28,2208.54 ; 3971.75,2205 cw(c3971.75,2192.93) v1@3980.28,2201.46 ; 3971.75,2205 ccw(c3971.75,2217.07) v1@3980.28,2208.54 ; 3971.75,2205 cw(c3971.75,2192.93) v1@3980.28,2201.46 ; 3971.75,2205 ccw(c3971.75,2217.07) v1@3980.28,2208.54 ; 3971.75,2205 cw(c3971.75,2192.93) v1@3980.28,2201.46 ; v1@3980.28,2208.54 ccw(c3971.75,2217.07) 3983.82,2217.07 ; v1@3980.28,2208.54 ccw(c3971.75,2217.07) 3983.82,2217.07 ; v1@3980.28,2208.54 ccw(c3971.75,2217.07) 3983.82,2217.07 ; v1@3980.28,2208.54 ccw(c3971.75,2217.07) 3983.82,2217.07 ; 3983.82,2217.07 ccw(c3995.89,2217.07) v1@3987.35,2208.54 ; 3983.82,2217.07 ccw(c3995.89,2217.07) v1@3987.35,2208.54 ; 3983.82,2217.07 ccw(c3995.89,2217.07) v1@3987.35,2208.54 ; 3983.82,2217.07 ccw(c3995.89,2217.07) v1@3987.35,2208.54 ; C8.2@4040.82,2515.67 cw(c4027.32,2500) 4048,2500 ; C8.2@4040.82,2515.67 cw(c4027.32,2500) 4048,2500 ; C8.2@4040.82,2515.67 cw(c4027.32,2500) 4048,2500 ; C8.2@4040.82,2515.67 cw(c4027.32,2500) 4048,2500 ; C8.2@4040.82,2515.67 cw(c4027.32,2500) 4048,2500 ; C8.2@4040.82,2515.67 cw(c4027.32,2500) 4048,2500 ; C8.2@4040.82,2515.67 cw(c4027.32,2500) 4048,2500 ; C8.2@4040.82,2515.67 cw(c4027.32,2500) 4048,2500 ; C8.2@4040.82,2515.67 cw(c4027.32,2500) 4048,2500 ; C8.2@4042.72,2514.35 cw(c4038.88,2507.35) 4046.84,2506.82 ; C8.2@4042.72,2514.35 cw(c4038.88,2507.35) 4046.84,2506.82 ; C8.2@4042.72,2514.35 cw(c4038.88,2507.35) 4046.84,2506.82 ; C8.2@4042.72,2514.35 cw(c4038.88,2507.35) 4046.84,2506.82 ; C8.2@4042.72,2514.35 cw(c4038.88,2507.35) 4046.84,2506.82 ; C8.2@4042.72,2514.35 cw(c4038.88,2507.35) 4046.84,2506.82 ; C8.2@4042.72,2514.35 cw(c4038.88,2507.35) 4046.84,2506.82 ; C8.2@4042.72,2514.35 cw(c4038.88,2507.35) 4046.84,2506.82 ; C8.2@4044.06,2513.73 cw(c4041.2,2506.28) 4049.16,2506.82 ; C8.2@4044.06,2513.73 cw(c4041.2,2506.28) 4049.16,2506.82 ; C8.2@4044.06,2513.73 cw(c4041.2,2506.28) 4049.16,2506.82 ; C8.2@4044.06,2513.73 cw(c4041.2,2506.28) 4049.16,2506.82 ; C8.2@4044.06,2513.73 cw(c4041.2,2506.28) 4049.16,2506.82 ; C8.2@4044.06,2513.73 cw(c4041.2,2506.28) 4049.16,2506.82 ; C8.2@4044.06,2513.73 cw(c4041.2,2506.28) 4049.16,2506.82 ; C8.2@4044.06,2513.73 cw(c4041.2,2506.28) 4049.16,2506.82 ; 4046.84,2506.82 cw(c4054.8,2506.28) C8.2@4051.94,2513.73 ; 4046.84,2506.82 cw(c4054.8,2506.28) C8.2@4051.94,2513.73 ; 4046.84,2506.82 cw(c4054.8,2506.28) C8.2@4051.94,2513.73 ; 4046.84,2506.82 cw(c4054.8,2506.28) C8.2@4051.94,2513.73 ; 4046.84,2506.82 cw(c4054.8,2506.28) C8.2@4051.94,2513.73 ; 4046.84,2506.82 cw(c4054.8,2506.28) C8.2@4051.94,2513.73 ; 4046.84,2506.82 cw(c4054.8,2506.28) C8.2@4051.94,2513.73 ; 4046.84,2506.82 cw(c4054.8,2506.28) C8.2@4051.94,2513.73 ; 4046.84,2506.82 C8.2@4048,2524 ; 4048,2500 cw(c4068.68,2500) C8.2@4055.18,2515.67 ; 4048,2500 cw(c4068.68,2500) C8.2@4055.18,2515.67 ; 4048,2500 cw(c4068.68,2500) C8.2@4055.18,2515.67 ; 4048,2500 cw(c4068.68,2500) C8.2@4055.18,2515.67 ; 4048,2500 cw(c4068.68,2500) C8.2@4055.18,2515.67 ; 4048,2500 cw(c4068.68,2500) C8.2@4055.18,2515.67 ; 4048,2500 cw(c4068.68,2500) C8.2@4055.18,2515.67 ; 4048,2500 cw(c4068.68,2500) C8.2@4055.18,2515.67 ; 4048,2500 cw(c4068.68,2500) C8.2@4055.18,2515.67 ; 4048,2500 C8.2@4048,2524 ; C8.2@4048,2524 4049.16,2506.82 ; C8.2@4048,2535 ccw(c4048,2561.56) 4066.78,2542.78 ; C8.2@4048,2535 ccw(c4048,2561.56) 4066.78,2542.78 ; C8.2@4048,2535 ccw(c4048,2561.56) 4066.78,2542.78 ; C8.2@4048,2535 ccw(c4048,2561.56) 4066.78,2542.78 ; C8.2@4048,2535 ccw(c4048,2561.56) 4066.78,2542.78 ; C8.2@4048,2535 ccw(c4048,2561.56) 4066.78,2542.78 ; C8.2@4048,2535 ccw(c4048,2561.56) 4066.78,2542.78 ; C8.2@4048,2535 ccw(c4048,2561.56) 4066.78,2542.78 ; 4049.16,2506.82 cw(c4057.12,2507.35) C8.2@4053.28,2514.35 ; 4049.16,2506.82 cw(c4057.12,2507.35) C8.2@4053.28,2514.35 ; 4049.16,2506.82 cw(c4057.12,2507.35) C8.2@4053.28,2514.35 ; 4049.16,2506.82 cw(c4057.12,2507.35) C8.2@4053.28,2514.35 ; 4049.16,2506.82 cw(c4057.12,2507.35) C8.2@4053.28,2514.35 ; 4049.16,2506.82 cw(c4057.12,2507.35) C8.2@4053.28,2514.35 ; 4049.16,2506.82 cw(c4057.12,2507.35) C8.2@4053.28,2514.35 ; 4049.16,2506.82 cw(c4057.12,2507.35) C8.2@4053.28,2514.35 ; C8.2@4059,2524 cw(c4085.56,2524) 4066.78,2542.78 ; C8.2@4059,2524 cw(c4085.56,2524) 4066.78,2542.78 ; C8.2@4059,2524 cw(c4085.56,2524) 4066.78,2542.78 ; C8.2@4059,2524 cw(c4085.56,2524) 4066.78,2542.78 ; C8.2@4059,2524 cw(c4085.56,2524) 4066.78,2542.78 ; C8.2@4059,2524 cw(c4085.56,2524) 4066.78,2542.78 ; C8.2@4059,2524 cw(c4085.56,2524) 4066.78,2542.78 ; C8.2@4059,2524 cw(c4085.56,2524) 4066.78,2542.78 ; 4201.44,2379 cw(c4201.44,2352.44) R10.2@4220.22,2371.22 ; 4201.44,2379 ccw(c4201.44,2405.56) R10.2@4220.22,2386.78 ; 4201.44,2379 ccw(c4201.44,2405.56) R10.2@4220.22,2386.78 ; 4201.44,2379 cw(c4201.44,2352.44) R10.2@4220.22,2371.22 ; 4201.44,2379 ccw(c4201.44,2405.56) R10.2@4220.22,2386.78 ; 4201.44,2379 cw(c4201.44,2352.44) R10.2@4220.22,2371.22 ; 4201.44,2379 ccw(c4201.44,2405.56) R10.2@4220.22,2386.78 ; 4201.44,2379 cw(c4201.44,2352.44) R10.2@4220.22,2371.22 ; 4201.44,2379 ccw(c4201.44,2405.56) R10.2@4220.22,2386.78 ; 4201.44,2379 cw(c4201.44,2352.44) R10.2@4220.22,2371.22 ; 4201.44,2379 ccw(c4201.44,2405.56) R10.2@4220.22,2386.78 ; 4201.44,2379 cw(c4201.44,2352.44) R10.2@4220.22,2371.22 ; 4201.44,2379 ccw(c4201.44,2405.56) R10.2@4220.22,2386.78 ; 4201.44,2379 cw(c4201.44,2352.44) R10.2@4220.22,2371.22 ; 4201.44,2379 ccw(c4201.44,2405.56) R10.2@4220.22,2386.78 ; 4201.44,2379 cw(c4201.44,2352.44) R10.2@4220.22,2371.22
pads on no net: JS1.0 JS1.7 JS2.0 JS2.7 KEY_CANCEL1. KEY_OK1. LM.4 P?.5 P?.24 P?.35 P?.38 P?.39 P?.40 PW1.0 S2. S3. S4. S5. S6. S7. S8. S9. S10. S11. S12. S13. USB1.2 USB1.3 USB1.4
copper on no net:
  other v1: 6955,970 1165,1440 1375,1515 7020,1645 760,1665 1825,1815 6465,1840 3680,1970 4380,2175 1930,2320 6190,2520 5445,2540 2725,2560 6860,2560 3890,2710 930,2750 3265,2970 6920,3135 5015,3185 4865,3410 1685,3495 875,3680 6650,4160 2435,4185

## Polygon pours and split planes (outlines as drawn)
GND on Bottom Layer "Keep-Out Layer-No Net" (solid, remove dead copper, pour order 8): 120,5755 8095,5755 8495,5355 8295,5155 8295,270 165,270 155,260
GND on Top Layer "Keep-Out Layer-No Net" (solid, remove dead copper, pour order 10): 130,5660 180,5610 8155,5610 8155,290 8175,270 8115,210 245,210

## Keep-outs
Keep-Out Layer:
  lines w10: 415,925 ccw(c965,1000) 1501.32,856.85 ; 417.21,924.86 635,4445 cw(c1544.47,4284.64) 2113.03,5012.36 ; 1496.95,858.67 1916.87,1866.97 ccw(c2640,1920) 3363.97,1880.06 4715.06,1880.06 ; 1500,840 ccw(c955,925) 1502.33,856.58 ; 2122.64,5012.36 6072.36,5012.36 ; 4711.03,1880.06 ccw(c5435,1920) 6158.13,1866.97 ; 6066.97,5012.36 cw(c6635.53,4284.64) 7545,4445 ; 6158.52,1867.18 6678.68,861.85 ccw(c7215,1005) 7765,930 ; 7545,4455 7762.79,934.86

## Silkscreen, mask and mechanical layers (free items; w line width, h text height)
Top Overlay:
  text "3V3" at 4990,4315 h60
  text "GND" at 4995,4230 h60
  text "RXD" at 4995,4130 h60
  text "TXD" at 4990,4030 h60
  text "3V3" at 3055,3560 h60
  text "SWDIO" at 2940,3470 h60
  text "SWCLK" at 2935,3360 h60
  text "GND" at 3045,3255 h60
  text "NRST" at 2990,3160 h60
  text "+" at 1130,2510 h60
  text "-" at 1130,2415 h60